# Altium PCB IDC50ToSensor.PcbDoc
Units mm, origin at the board's own origin, x right, y up, seen from the top; angles counter-clockwise.
Board outline 85 x 38 mm, 2 copper layers (Top Layer, Bottom Layer); 4 components, 16 nets, 90 pads, 41 vias.
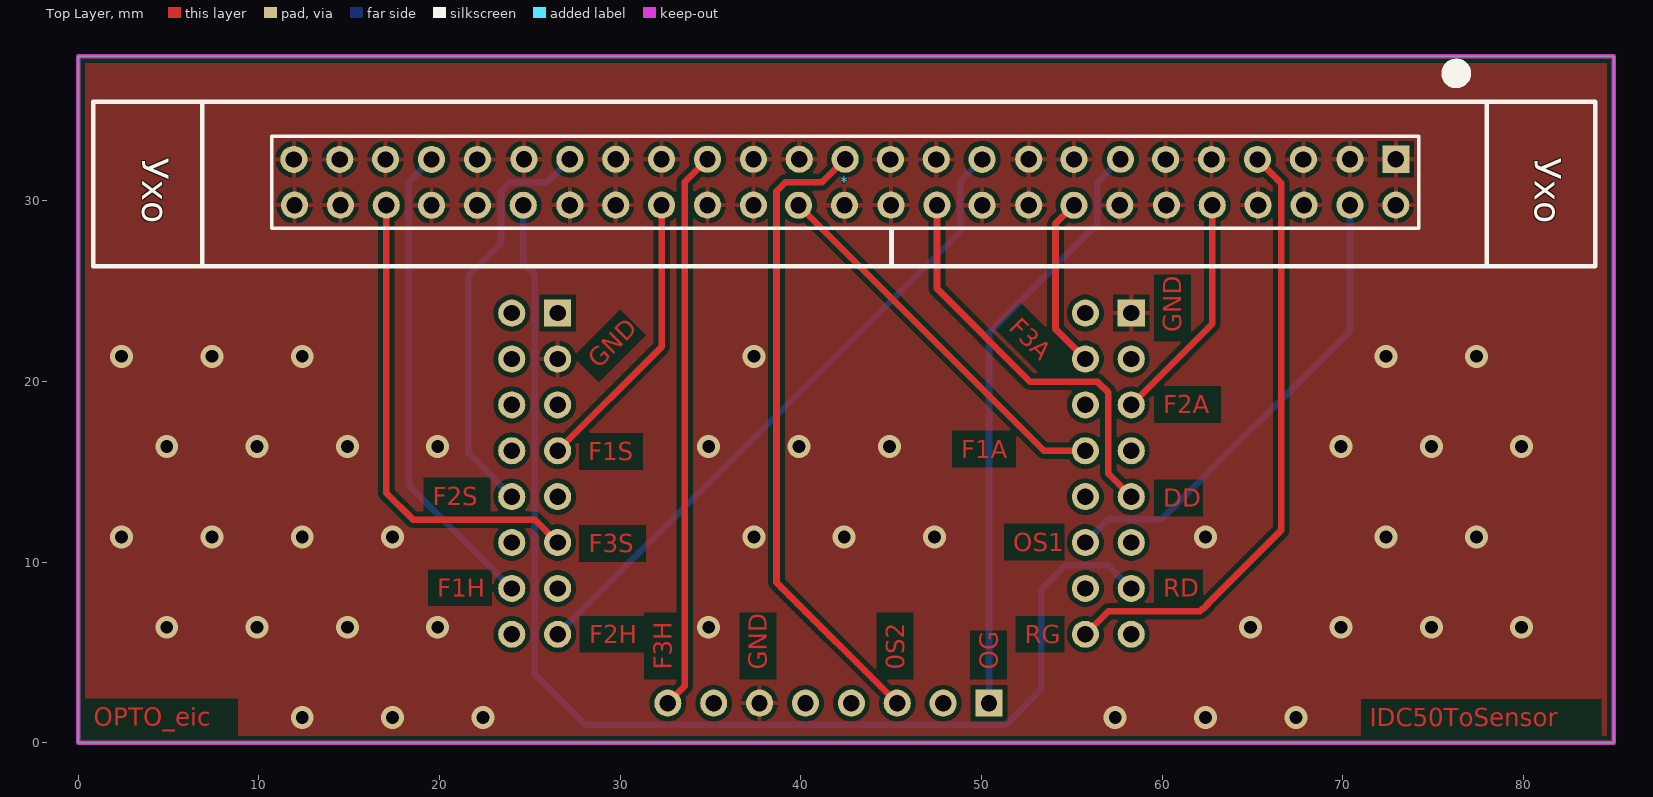
[diagram p0: Top Layer view]
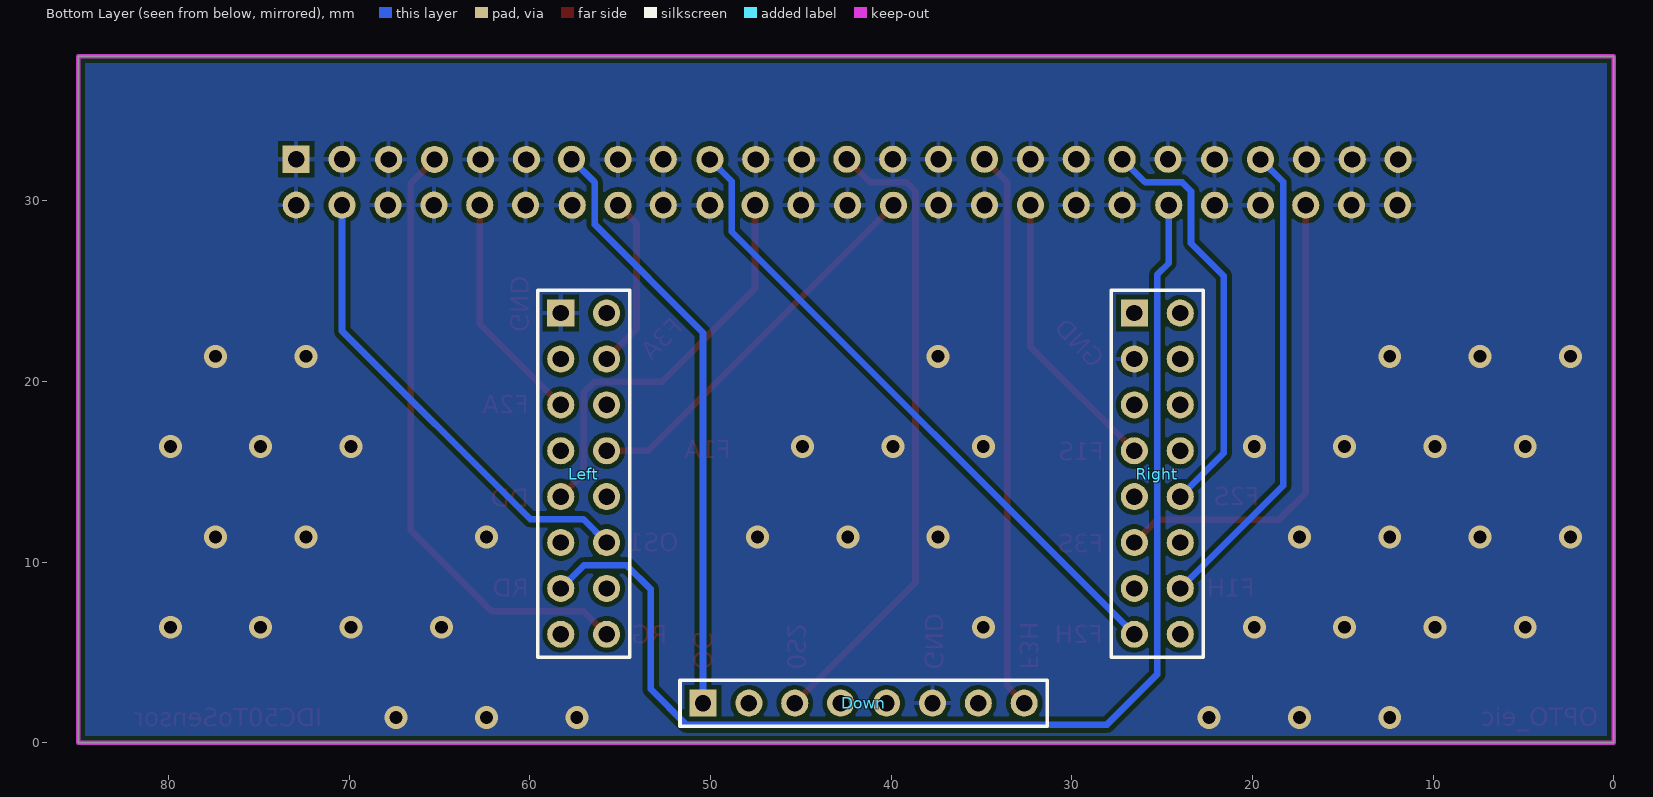
[diagram p1: Bottom Layer view, seen from below]

## Layer stack, top to bottom
Top Solder: solder mask 0.0102, Solder Resist, Dk 3.5
Top Layer: signal copper 0.0356
Dielectric 1: dielectric 0.32, FR-4, Dk 4.8
Bottom Layer: signal copper 0.0356
Bottom Solder: solder mask 0.0102, Solder Resist, Dk 3.5

## Board outline
0,0 0,38 85,38 85,0

## Design rules (kind name [scope] priority, off if disabled: settings)
BoardOutlineClearance [OnLayer('Multi-Layer')] p1: gap=0.254 ignorepadtopadclearanceinfootprint=FALSE except(0: Arc-SplitContinuation Track-SplitContinuation SMDPad-SplitContinuation THPad-SplitContinuation Via-SplitContinuation Fill-SplitContinuation Poly-SplitContinuation Region-SplitContinuation Text-SplitContinuation; 0.4: Arc-OutlineEdge Track-OutlineEdge SMDPad-OutlineEdge THPad-OutlineEdge Via-OutlineEdge Fill-OutlineEdge Poly-OutlineEdge Region-OutlineEdge Text-OutlineEdge)
Clearance [All] p1: gap=0.254 ignorepadtopadclearanceinfootprint=FALSE
DiffPairsRouting [All] p1: maxlimit=0.254 minlimit=0.127 mostfreqgap=0.13 toplayer_minwidth=0.127 toplayer_maxwidth=0.381 toplayer_prefwidth=0.37 bottomlayer_minwidth=0.127 bottomlayer_maxwidth=0.381 bottomlayer_prefwidth=0.37 maxuncoupledlength=12.7
HoleSize [All] p1: absolutevalues=TRUE maxlimit=5 minlimit=0.3 maxpercent=80.000 minpercent=20.000
MinimumSolderMaskSliver [All] p1: minsoldermaskwidth=0.1
PlaneClearance [All] p1: clearance=1
PolygonConnect [All] p1: connectstyle=Relief reliefconductorwidth=0.254 reliefentries=4 polygonreliefangle="90 Angle" airgapwidth=0.254
RoutingVias [All] p1: holewidth=0.3 width=1.27 viastyle="Through Hole" minholewidth=0.3 minwidth=0.6 maxholewidth=0.711 maxwidth=1.27
SilkToSilkClearance [All] p1: silktosilkclearance=0
SilkToSolderMaskClearance [IsPad] p1: minsilkscreentomaskgap=0 clearancetoexposedcopper=TRUE
SolderMaskExpansion [All] p1: expansion=0.102 istentingtop=FALSE
UnRoutedNet [All] p1: checkbadconnections=TRUE
Width [All] p1: maxlimit=2.5 minlimit=0.125 preferedwidth=0.37
23 further rules are at their usual default settings.

## Classes and differential pairs
component class IDC50ToSensor: Down Left Right

## Components (designator, comment, footprint, x,y, rotation, side; value= is the part's Value field where it differs from the comment)
* "IDC50" IDC50 38.609,31.701 r180 top
Down "Header 8" HDR1X8 50.416,2.19 r180 bottom locked
Left "Header 8X2" HDR2X8 58.29,23.78 r270 bottom locked
Right "Header 8X2" HDR2X8 26.54,23.78 r270 bottom locked

## Footprints (in the part's own frame and the unit in brackets; to place one, negate y for a bottom-side part, rotate by r counter-clockwise, add the part's x,y. Pads: shape width x height; smd on the part's side, far side on the other; paste and mask are expansions set on the pad)
HDR1X8 [mm] "Connector; Header; 8 Position"
  rect 1.5x1.5 hole 0.9: 1(0,0)
  round 1.5 hole 0.9: 2(2.54,0) 3(5.08,0) 4(7.62,0) 5(10.16,0) 6(12.7,0) 7(15.24,0) 8(17.78,0)
  silkscreen extent -1.27,-1.27 19.05,1.27
HDR2X8 [mm] "Connector; Header; 8x2 Position"
  rect 1.5x1.5 hole 0.9: 1(0,0)
  round 1.5 hole 0.9: 2(0,2.54) 3(2.54,0) 4(2.54,2.54) 5(5.08,0) 6(5.08,2.54) 7(7.62,0) 8(7.62,2.54) 9(10.16,0) 10(10.16,2.54) 11(12.7,0) 12(12.7,2.54) 13(15.24,0) 14(15.24,2.54) 15(17.78,0) 16(17.78,2.54)
  silkscreen extent -1.27,-1.27 19.05,3.81
IDC50 [mm]
  rect 1.5x1.5 hole 0.9: 1(-34.325,-0.595)
  round 1.5 hole 0.9: 2(-34.325,1.945) 3(-31.785,-0.595) 4(-31.785,1.945) 5(-29.206,-0.588) 6(-29.245,1.945) 7(-26.666,-0.588) 8(-26.705,1.945) 9(-24.126,-0.588) 10(-24.165,1.945) 11(-21.586,-0.588) 12(-21.625,1.945) 13(-19.085,-0.595) 14(-19.046,1.952) 15(-16.506,-0.588) 16(-16.506,1.952) 17(-14.005,-0.595) 18(-14.005,1.945) 19(-11.426,-0.588) 20(-11.426,1.952) 21(-8.886,-0.588) 22(-8.925,1.945) 23(-6.346,-0.588) 24(-6.385,1.945) 25(-3.845,-0.595) 26(-3.806,1.952) 27(-1.305,-0.595) 28(-1.266,1.952) 29(1.235,-0.595) 30(1.235,1.945) 31(3.775,-0.595) 32(3.775,1.945) 33(6.315,-0.595) 34(6.315,1.945) 35(8.855,-0.595) 36(8.855,1.945) 37(11.395,-0.595) 38(11.395,1.945) 39(13.935,-0.595) 40(13.974,1.952) 41(16.514,-0.588) 42(16.514,1.952) 43(19.054,-0.588) 44(19.054,1.952) 45(21.594,-0.588) 46(21.555,1.945) 47(24.134,-0.588) 48(24.095,1.945) 49(26.674,-0.588) 50(26.635,1.945)
  silkscreen extent -45.35,-5.73 37.78,5.33

## Part data
Down: "Header, 8-Pin", LatestRevisionDate=17-Jul-2002, LatestRevisionNote="Re-released for DXP Platform.", Publisher="Altium Limited"
Left Right: "Header, 8-Pin, Dual row", LatestRevisionDate=17-Jul-2002, LatestRevisionNote="Re-released for DXP Platform.", Publisher="Altium Limited"

## Via types
v1: diameter 1.27, hole 0.711, Top Layer to Bottom Layer, 41 vias

## Nets (pads, with @x,y where several pads share a name; then routed paths per layer and width w, separated by ;. In a path a pad name is that pad's centre, name@x,y a point inside that pad or via, vN(x,y) a via of type N, cw(c..) or ccw(c..) an arc to the next point about the centre after c; other vN are vias at no path point)
DD: *.22 Left.9 | length 22.8
  Top Layer w0.37: *.22 47.533,25.139 52.697,19.975 56.425,19.975 57.025,19.375 57.025,14.885 Left.9
F1A: *.28 Left.8 | length 21.5
  Top Layer w0.37: *.28 53.464,16.16 Left.8
F1H: *.43 Right.14 | length 26.6
  Bottom Layer w0.37: *.43 18.3,31.034 18.3,14.24 Right.14
F1S: *.34 Right.7 | length 16
  Top Layer w0.37: Right.7 32.293,21.913 *.34
F2A: *.10 Left.5 | length 12.9
  Top Layer w0.37: Left.5 62.773,23.183 *.10
F2H: *.19 Right.15 | length 36
  Bottom Layer w0.37: Right.15 48.825,28.285 48.825,31.079 *.19
F2S: *.37 Right.10 | length 23.2
  Bottom Layer w0.37: Right.10 21.587,16.033 21.587,25.837 23.4,27.65 23.4,30.525 23.9,31.025 25.942,31.025 *.37
F3A: *.16 Left.4 | length 9.6
  Top Layer w0.37: *.16 54.099,28.733 54.099,22.891 Left.4
F3H: *.31 Down.8 | length 31
  Top Layer w0.37: Down.8 33.575,3.129 33.575,31.038 *.31
F3S: *.46 Right.11 | length 26.6
  Top Layer w0.37: *.46 17.053,13.822 18.525,12.35 25.27,12.35 Right.11
GND: *.1 *.2 *.3 *.5 *.6 *.8 *.9 *.11 *.12 *.14 *.15 *.17 *.18 *.20 *.21 *.23 *.24 *.26 *.27 *.29 *.30 *.32 *.33 *.35 *.36 *.38 *.39 *.41 *.42 *.44 *.45 *.47 *.48 *.49 *.50 Down.6 Left.1 Right.3
  other v1: 12.4,1.39 17.4,1.39 22.4,1.39 57.4,1.39 62.4,1.39 67.4,1.39 4.9,6.39 9.9,6.39 14.9,6.39 19.9,6.39 34.9,6.39 64.9,6.39 69.9,6.39 74.9,6.39 79.9,6.39 2.4,11.39 7.4,11.39 12.4,11.39 17.4,11.39 37.4,11.39 42.4,11.39 47.4,11.39 62.4,11.39 72.4,11.39 77.4,11.39 4.9,16.39 9.9,16.39 14.9,16.39 19.9,16.39 34.9,16.39 39.9,16.39 44.9,16.39 69.9,16.39 74.9,16.39 79.9,16.39 2.4,21.39 7.4,21.39 12.4,21.39 37.4,21.39 72.4,21.39 77.4,21.39
OG: *.13 Down.1 | length 33.1
  Bottom Layer w0.37: Down.1 50.416,22.691 56.4,28.675 56.4,31.003 *.13
OS1: *.4 Left.12 | length 26.5
  Bottom Layer w0.37: Left.12 57.045,12.375 59.975,12.375 70.393,22.793 *.4
OS2: *.25 Down.3 | length 35.6
  Top Layer w0.37: *.25 41.182,31.025 39.15,31.025 38.65,30.525 38.65,8.876 Down.3
RD: *.40 Left.13 | length 67.8
  Bottom Layer w0.37: *.40 24.635,26.54 25.275,25.9 25.275,3.775 28.049,1.001 51.348,1.001 53.303,2.956 53.303,8.478 54.65,9.825 57.005,9.825 Left.13
RG: *.7 Left.16 | length 34.3
  Top Layer w0.37: Left.16 57.025,7.275 62.1,7.275 62.211,7.386 62.256,7.386 62.513,7.643 62.513,7.688 66.6,11.775 66.6,30.964 *.7
pads on no net: Down.2 Down.4 Down.5 Down.7 Left.2 Left.3 Left.6 Left.7 Left.10 Left.11 Left.14 Left.15 Right.1 Right.2 Right.4 Right.5 Right.6 Right.8 Right.9 Right.12 Right.13 Right.16

## Polygon pours and split planes (outlines as drawn)
GND on Bottom Layer "NONET_L-01_P-001" (solid, pour order 2): 0,38 85,38 85,0 0,0
GND on Top Layer "Top Overlay-No Net" (solid, remove dead copper, pour order 3): 0,38 0,0 85,0 85,38

## Keep-outs
Keep-Out Layer:
  the board outline again, w0.254

## Other copper
Top Layer:
  text "F3A" at 51.459,22.925 h1 r315
  text "GND" at 61.071,22.729 h1 r90
  text "GND" at 28.825,20.659 h1 r45
  text "F2A" at 60.071,18.229 h1
  text "F1A" at 48.879,15.754 h1
  text "F1S" at 28.229,15.629 h1
  text "F2S" at 19.629,13.154 h1
  text "DD" at 60.071,13.054 h1
  text "OS1" at 51.754,10.604 h1
  text "F3S" at 28.254,10.529 h1
  text "F1H" at 19.879,8.079 h1
  text "RD" at 60.071,8.079 h1
  text "F2H" at 28.279,5.504 h1
  text "RG" at 52.404,5.504 h1
  text "F3H" at 32.846,4.029 h1 r90
  text "GND" at 38.121,4.029 h1 r90
  text "0S2" at 45.721,4.029 h1 r90
  text "OG" at 50.896,4.029 h1 r90
  text "OPTO_eic" at 0.854,0.946 h1
  text "IDC50ToSensor" at 71.498,0.92 h1

## Text inside footprints (layer, text, board x,y; h text height)
*: Top Overlay "Ухо" at 80.14,32.384 h2.52 r270; Top Overlay "Ухо" at 3.04,32.384 h2.52 r270